# Altium PCB CPCIS_PWR_MOD_DC.pcbdoc
Units mm, origin at the board's own origin, x right, y up, seen from the top; angles counter-clockwise.
Board outline 159.9 x 99.9 mm, 2 copper layers (Top Layer, Bottom Layer), stack 1.57 mm thick; 60 components, 62 nets, 359 pads, 0 vias.
Unrouted connection lines stored in the file: 135.
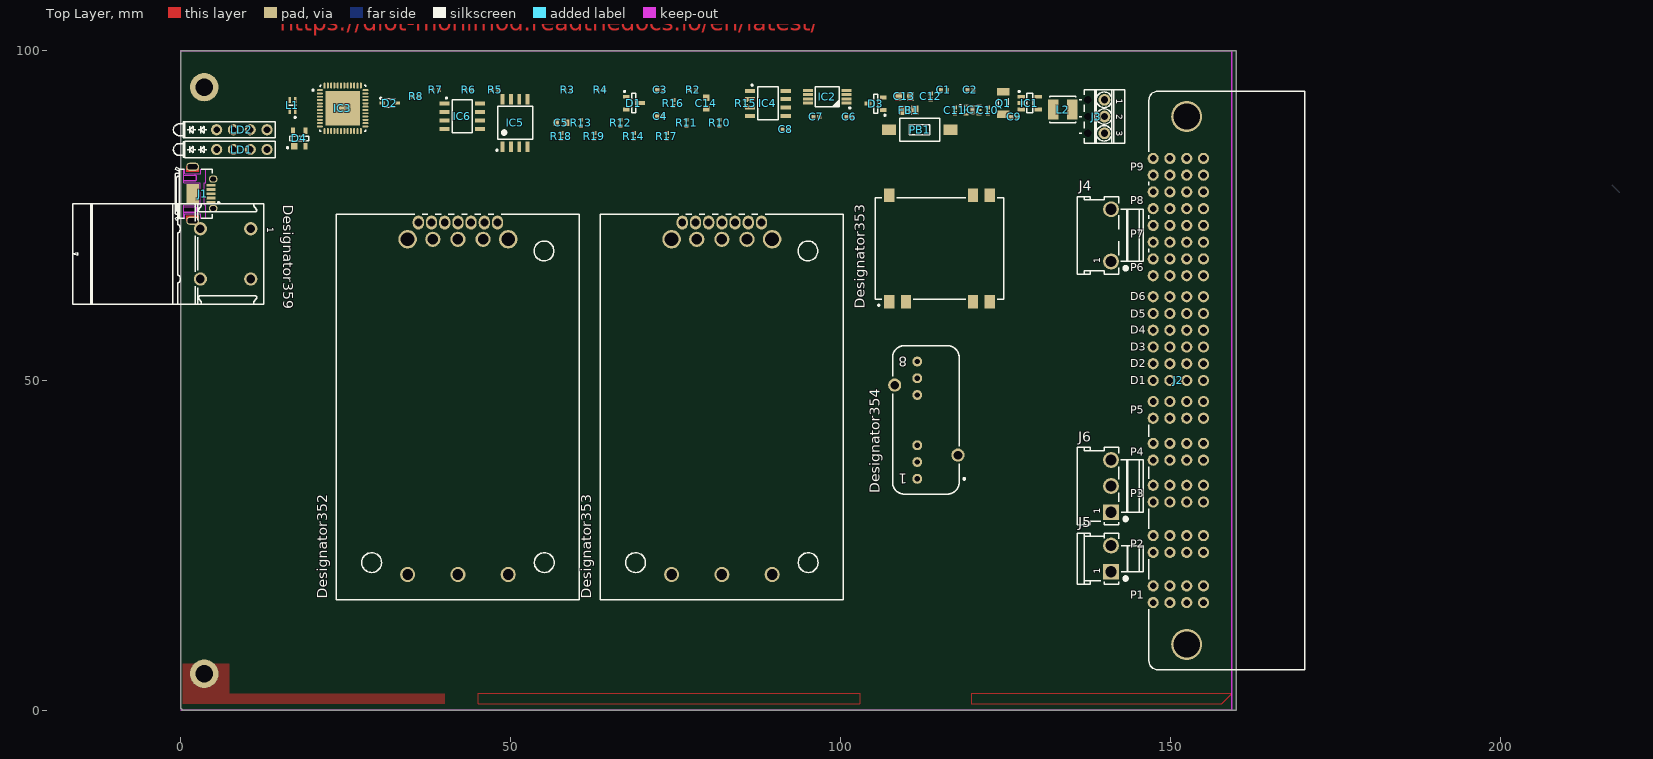
[diagram p0: Top Layer view]
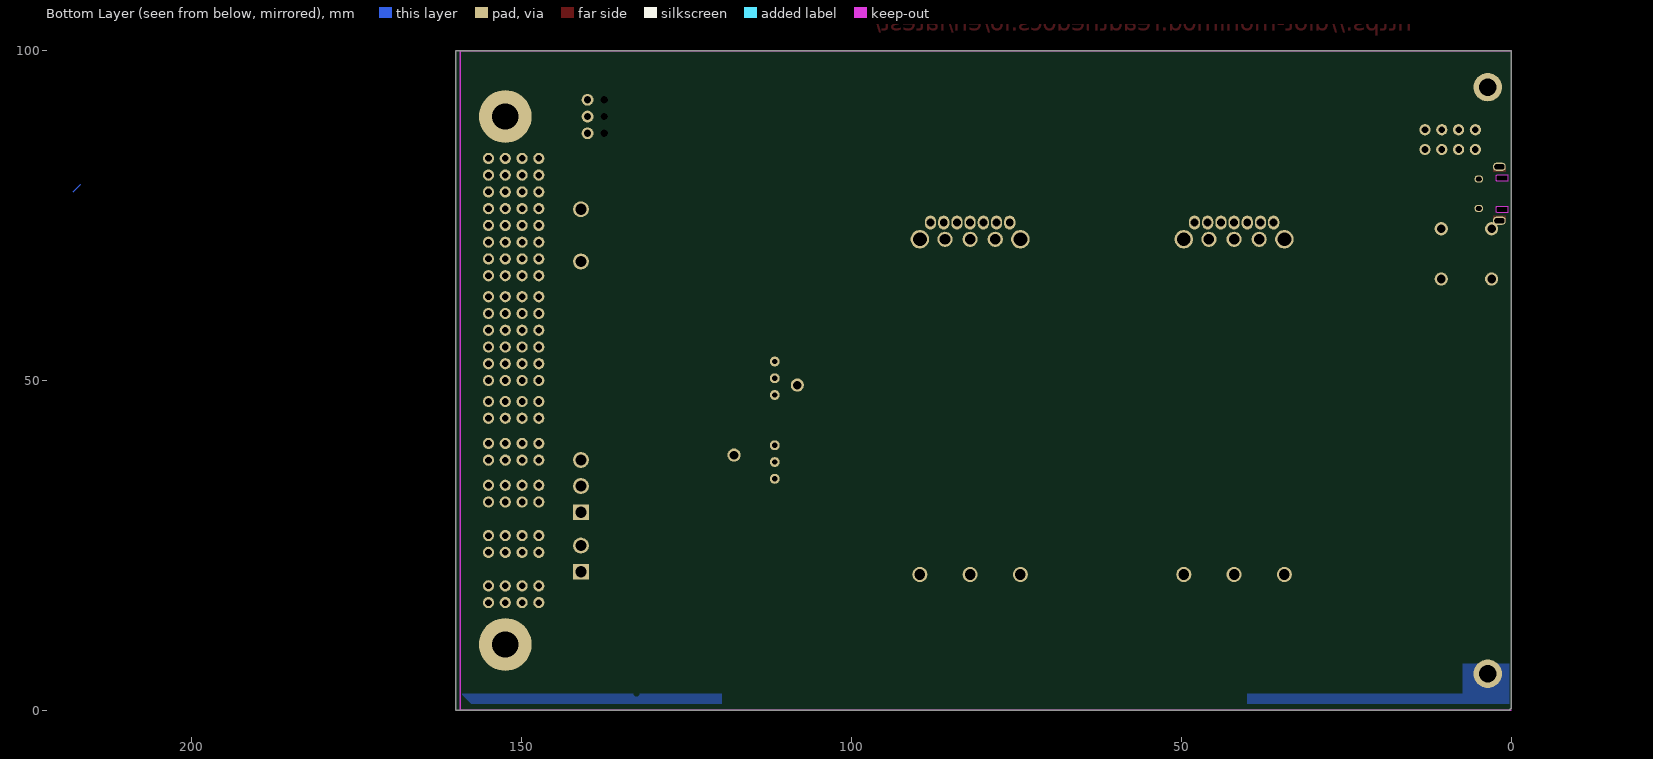
[diagram p1: Bottom Layer view, seen from below]

## Layer stack, top to bottom
Top Solder: solder mask 0.01, Solder Resist, Dk 3.5
Top Layer: signal copper 0.035
Dielectric 6: core 1.5, FR-4, Dk 4.6
Bottom Layer: signal copper 0.035
Bottom Solder: solder mask 0.01, Solder Resist, Dk 3.5

## Board outline
0.05,0.249 cw(c0,0) 0.18,0.18 cw(c0,0) 0.249,0.05 159.95,0.05 159.95,99.95 0.05,99.95

## Design rules (kind name [scope] priority, off if disabled: settings)
Clearance Clearance_NT [InComponent('NT*')] p1: gap=0 ignorepadtopadclearanceinfootprint=TRUE
Clearance Clearance_Poly [InPoly] p2: gap=0.18 ignorepadtopadclearanceinfootprint=FALSE
Clearance [All vs not HasFootprint('Net Tie')] p3: gap=0.09 ignorepadtopadclearanceinfootprint=FALSE except(0: Arc-Hole Track-Hole SMDPad-Hole THPad-Hole Via-Hole Fill-Hole Poly-Hole Region-Hole Text-Hole)
ComponentClearance ComponentClearance_pressfit [HasCompParameterValue('PressFit','Yes') vs InComponent('No Component')] p1: gap=5 collisioncheckmode=3 verticalgap=0.254 showdistances=FALSE
ComponentClearance ComponentClearance_NM [InComponentClass('NotMounted')] p2: gap=0 collisioncheckmode=3 verticalgap=0 showdistances=FALSE
ComponentClearance ComponentClearance_Top [not InComponentClass('Overlapping') and InComponentClass('Top Side Components') vs InComponentClass('Top Side Components')] p3: gap=0 collisioncheckmode=3 verticalgap=2540 showdistances=FALSE
ComponentClearance Overlapping [InComponentClass('Overlapping') vs InComponentClass('Overlapping')] p4: gap=0 collisioncheckmode=3 verticalgap=0 showdistances=FALSE
DiffPairsRouting [All] p1: maxlimit=0.2 minlimit=0.2 mostfreqgap=0.2 toplayer_minwidth=0.1 toplayer_maxwidth=0.1 toplayer_prefwidth=0.1 bottomlayer_minwidth=0.1 bottomlayer_maxwidth=0.1 bottomlayer_prefwidth=0.1 maxuncoupledlength=50
FabricationTestPointUsage TestPointUsage [All] p1: valid=0 allowmultiple=FALSE
FabricationTestpoint Testpoint [All] p1: side=3 testpointundercomponent=TRUE minsize=1.016 maxsize=2.54 preferedsize=1.524 minholesize=0 maxholesize=1.016 preferedholesize=0.813 testpointgrid=0.025 allowsidetop=TRUE allowsidebottom=TRUE usegrid=TRUE gridtolerance=0
Height [All] p1: minheight=0 maxheight=25 prefheight=10
HoleSize [All] p1: absolutevalues=TRUE maxlimit=5 minlimit=0.2 maxpercent=80.000 minpercent=20.000
HoleToHoleClearance [All] p1: gap=0.2 allowstackedmicrovias=TRUE
Length "Length CPCIs2a + XS" [InNetClass('CPCIs2a') or InxSignalClass('CPCIs2 XS')] p1: maxlimit=126 minlimit=121
Length "Length CPCIs5a + XS" [InNetClass('CPCIs5a')    or InxSignalClass('CPCIs5 XS')] p2: maxlimit=155.1 minlimit=151
MatchedLengths DiffPair_gbtclkm2c_MatchedLengths [InDifferentialPair ('FMCGBTCLKM2C_C1') Or InDifferentialPair ('FMCGBTCLKM2C_C0')] p1: tolerance=5 checknetsindiffpair=FALSE checkdiffpairvsdiffpair=TRUE checkxsignals=TRUE checkothers=TRUE
MatchedLengths DiffPair_gbtxClockDes_MatchedLengths [InDifferentialPair ('GBTXCLOCKDES_N0') Or InDifferentialPair ('GBTXCLOCKDES_P0') Or InDifferentialPair ('GBTXCLOCKDES_N1') Or InDifferentialPair ('GBTXCLOCKDES_P1')Or InDifferentialPair ('GBTXCLOCKDES_N2') Or InDifferentialPair ('GBTXCLOCKDES_P2')Or InDifferentialPair ('GBTXCLOCKDES_N3') Or InDifferentialPair ('GBTXCLOCKDES_P3') Or InDifferentialPair ('GBTXCLOCKDES_N4') Or InDifferentialPair ('GBTXCLOCKDES_P4')] p2: tolerance=5 checknetsindiffpair=FALSE checkdiffpairvsdiffpair=TRUE checkxsignals=TRUE checkothers=TRUE
MatchedLengths DiffPair_Scout_ScclkMatchedLengths [InDifferentialPair ('GBTXELINKSSCCLK') Or InDifferentialPair ('GBTXELINKSSCOUT')] p3: tolerance=5 checknetsindiffpair=FALSE checkdiffpairvsdiffpair=TRUE checkxsignals=TRUE checkothers=TRUE
MinimumAnnularRing MinimumAnnularRing_Via [IsVia] p1: minimumring=0.12
MinimumAnnularRing [All] p2: minimumring=0.198
MinimumSolderMaskSliver [IsThruPin vs IsThruPin] p1: minsoldermaskwidth=0
NetAntennae [All] p1 off: netantennaetolerance=0
PermittedLayers [All] p1: toplayerpermitted=TRUE bottomlayerpermitted=FALSE
PlaneClearance [All] p1: clearance=0.25
PlaneConnect PlaneConnect_ft_pcbm [InPadClass('ft_pcbm')] p1: planeconnectstyle=Relief reliefexpansion=0.25 reliefentries=4 reliefconductorwidth=0.2 reliefairgap=0.2
PlaneConnect PlaneConnect_Vias [IsVia or InPadClass('Direct')] p2: planeconnectstyle=Direct reliefexpansion=0.508 reliefentries=4 reliefconductorwidth=0.254 reliefairgap=0.254
PlaneConnect "PlaneConnect_0 > 0.5" [AsMM(HoleDiameter)<0.5] p3: planeconnectstyle=Relief reliefexpansion=0.3 reliefentries=4 reliefconductorwidth=0.2 reliefairgap=0.2
PlaneConnect "PlaneConnect_0.5 > 1" [(AsMM(HoleDiameter)>=0.5) and (AsMM(HoleDiameter)<1)] p4: planeconnectstyle=Relief reliefexpansion=0.3 reliefentries=4 reliefconductorwidth=0.25 reliefairgap=0.2
PlaneConnect "PlaneConnect_1 > 1.5" [(AsMM(HoleDiameter)>=1) and (AsMM(HoleDiameter)<1.5)] p5: planeconnectstyle=Relief reliefexpansion=0.3 reliefentries=4 reliefconductorwidth=0.3 reliefairgap=0.2
PlaneConnect "PlaneConnect_1.5 > 2" [(AsMM(HoleDiameter)>=1.5) and (AsMM(HoleDiameter)<2)] p6: planeconnectstyle=Relief reliefexpansion=0.3 reliefentries=4 reliefconductorwidth=0.4 reliefairgap=0.2
PlaneConnect [All] p7: planeconnectstyle=Relief reliefexpansion=0.3 reliefentries=4 reliefconductorwidth=0.5 reliefairgap=0.2
PolygonConnect PolygonConnect_Vias [IsVia or InPadClass('Direct') or InNetClass('ESD_STRIP')] p1: connectstyle=Direct reliefconductorwidth=0.254 reliefentries=4 polygonreliefangle="90 Angle" airgapwidth=0.254
PolygonConnect "PolygonConnect_0 > 0.5" [AsMM(HoleDiameter)<0.5] p2: connectstyle=Relief reliefconductorwidth=0.2 reliefentries=4 polygonreliefangle="90 Angle" airgapwidth=0.2
PolygonConnect "PolygonConnect_0.5 > 1" [(AsMM(HoleDiameter)>=0.5) and (AsMM(HoleDiameter)<1)] p3: connectstyle=Relief reliefconductorwidth=0.25 reliefentries=4 polygonreliefangle="90 Angle" airgapwidth=0.2
PolygonConnect "PolygonConnect_1 > 1.5" [(AsMM(HoleDiameter)>=1) and (AsMM(HoleDiameter)<1.5)] p4: connectstyle=Relief reliefconductorwidth=0.3 reliefentries=4 polygonreliefangle="90 Angle" airgapwidth=0.2
PolygonConnect "PolygonConnect_1.5 > 2" [(AsMM(HoleDiameter)>=1.5) and (AsMM(HoleDiameter)<2)] p5: connectstyle=Relief reliefconductorwidth=0.4 reliefentries=4 polygonreliefangle="90 Angle" airgapwidth=0.2
PolygonConnect [All] p6: connectstyle=Relief reliefconductorwidth=0.5 reliefentries=4 polygonreliefangle="90 Angle" airgapwidth=0.2
RoomDefinition CPCIS_PWR_MOD [InComponentClass('CPCIS_PWR_MOD')] p1: confinementstyle=ConfineIn formatcopy=TRUE lockcomponents=FALSE outline 58.332,10.737 73.343,10.737 73.343,70.732 58.332,70.732
RoutingVias [All] p1: holewidth=0.3 width=0.65 viastyle="Through Hole" minholewidth=0.2 minwidth=0.45 maxholewidth=0.5 maxwidth=1
ShortCircuit ShortCircuit_NT [InComponent('J34') or  InComponent('J31') or InComponent('J30') or InComponent('J29') or InComponent('J33') or InComponent('J26') vs InComponent('NT*')] p1: allowed=TRUE
ShortCircuit [All] p2: allowed=FALSE
SilkToSilkClearance [All] p1: silktosilkclearance=0.05
SilkToSolderMaskClearance [IsPad] p1: minsilkscreentomaskgap=0.08 clearancetoexposedcopper=TRUE
SolderMaskExpansion [All] p1: expansion=0
ViasUnderSMD ViasUnderSMD_1 [HasFootprint ('CAPC0603X33N')   or HasFootprint ('RESC1005X40N')  or HasFootprint('CAPC1608X87N')   or HasFootprint('CAPC1005X55N')   or  HasFootprint('Net Tie')] p1: allowed=TRUE
ViasUnderSMD [not InComponentClass('Overlapping')] p2: allowed=FALSE
Width [All] p1: maxlimit=2.54 minlimit=0.1 preferedwidth=0.1 minimp=50.000000 maximp=50.000000 favimp=50.000000
16 further rules are at their usual default settings.

## Classes and differential pairs
pad class Direct: Free-P13

## Components (designator, comment, footprint, x,y, rotation, side; value= is the part's Value field where it differs from the comment)
C1 "12pF" CAPC1005X55N 115.675,94.05 r0 top
C2 "12pF" CAPC1005X55N 119.675,94.05 r0 top
C3 "100nF" CAPC1005X55N 72.675,94.05 r0 top
C4 "100nF" CAPC1005X55N 72.675,90.05 r0 top
C5 "1uF" CAPC1608X87N 57.675,89.05 r0 top
C6 "100nF" CAPC1005X55N 101.325,89.95 r180 top
C7 "100nF" CAPC1005X55N 96.325,89.95 r180 top
C8 "100nF" CAPC1005X55N 91.675,88.05 r0 top
C9 "100nF" CAPC1005X55N 126.325,89.95 r180 top
C10 "100nF" CAPC1005X55N 122.325,90.95 r270 top
C11 "100nF" CAPC1005X55N 117.325,90.95 r270 top
C12 "1uF" CAPC1005X55N 113.675,93.05 r90 top
C13 "10uF" CAPC2012X135N 109.675,93.05 r0 top
C14 "68pF" CAPC1608X87N 79.675,92.05 r90 top
D1 "SM712" SOT95P237X112-3N 68.675,92.05 r0 top
D2 "1N4148WS" SODFL2512X100N 31.675,92.05 r0 top
D3 "SM712" SOT95P237X112-3N 105.325,91.95 r180 top
D4 "PRTR5V0U2X" SOT190P230X110-4N 17.95,86.675 r90 top
Designator352 "Comment" DCDC_DELTA_Q48SC12033NRDH 42,46 r90 top
Designator353 "Comment" DCDC_TRACO_TMR2WISM 115,70 r90 top
Designator353 "Comment" DCDC_DELTA_Q48SC12033NRDH 82,46 r90 top
Designator354 "Comment" DCDC_TRACO_TMR9WI 113,44 r90 top
Designator359 "Comment" PHOENIX_1804797 6.81,69.19 r270 top
FB1 "220R@100MHz" INDC2012X105N 110.325,90.95 r180 top
IC1 "24AA02E48T-I/OT" SOT95P280X145-5N 128.675,92.05 r0 top
IC2 "M24256-BRDW6" SOP65P640X120-8N 98,93 r180 top
IC3 "ATSAMD21G18A-MF" QFN50P700X700X100-49N-S525 24.55,91.25 r0 top
IC4 "ST485ECDR" SOIC127P600X175-8N 89,92 r0 top
IC5 "AT25SF161-SSHD-B" SOIC127P790X216-8N 50.675,89.05 r90 top
IC6 "ST485ECDR" SOIC127P600X175-8N 42.675,90.05 r0 top
IC7 "AUR9705AGD" SON65P200X200X80-7N-R65X145 120,91 r0 top
J1 "Micro-USB AB 2.0" HIROSE_ZX62RD-AB-5P8(30) 4.61,78.3 r270 top
J2 "PwrBlade" AMPHENOL_51939-667 155,83.66 r0 top
J3 "=Family" PHOENIX_1725669 140,90 r270 top
J4 "KK®" MOLEX_26-62-4030 141,72 r90 top
J5 "KK®" MOLEX_26-60-4020 141,23 r90 top
J6 "KK®" MOLEX_26-60-4030 141,34 r90 top
L1 "90R@100MHz" IND_MURATA_DLW21S 16.95,91.675 r90 top
L2 "2.2uH" IND_MURATA_LQH44PN_P0 133.675,91.05 r0 top
LD1 "Red/Green" LED_DIALIGHT_571-0112F 5.46,85 r0 top
LD2 "Red/Green" LED_DIALIGHT_571-0112F 5.46,88 r0 top
PB1 "Push Button" PB_TYCO_FSMSM 112,88 r180 top
Q1 "32.768KHZ" XTAL_ABRACON_ABS09 124.675,92.05 r90 top
R2 "1k" RESC1005X40N 77.675,94.05 r0 top
R3 "10k" RESC1005X40N 58.675,94.05 r0 top
R4 "10k" RESC1005X40N 63.675,94.05 r0 top
R5 "1k" RESC1005X40N 47.675,94.05 r0 top
R6 "10k" RESC1005X40N 43.675,94.05 r0 top
R7 "1k" RESC1005X40N 38.675,94.05 r0 top
R8 "10k" RESC1005X40N 35.675,93.05 r0 top
R10 "10k" RESC1005X40N 81.675,89.05 r90 top
R11 "1k" RESC1005X40N 76.675,89.05 r90 top
R12 "49R9" RESC1005X40N 66.675,89.05 r90 top
R13 "10k" RESC1005X40N 60.675,89.05 r90 top
R14 "1k" RESC1005X40N 68.675,87.05 r90 top
R15 "100k" RESC1005X40N 85.675,92.05 r90 top
R16 "22k" RESC1005X40N 74.675,92.05 r90 top
R17 "1k" RESC1005X40N 73.675,87.05 r90 top
R18 "1k" RESC1005X40N 57.675,87.05 r90 top
R19 "1k" RESC1005X40N 62.675,87.05 r90 top

## Footprints (in the part's own frame and the unit in brackets; to place one, negate y for a bottom-side part, rotate by r counter-clockwise, add the part's x,y. Pads: shape width x height; smd on the part's side, far side on the other; paste and mask are expansions set on the pad)
AMPHENOL_51939-667 [mm] "Right Angle PowerBlade Power Connector 3ACP + 2P + 24S + 4P Contacts"
  round 1.7 hole 1: A1(0,-33.66) A2(0,-31.12) A3(0,-28.58) A4(0,-26.04) A5(0,-23.5) A6(0,-20.96) B1(-2.54,-33.66) B2(-2.54,-31.12) B3(-2.54,-28.58) B4(-2.54,-26.04) B5(-2.54,-23.5) B6(-2.54,-20.96) C1(-5.08,-33.66) C2(-5.08,-31.12) C3(-5.08,-28.58) C4(-5.08,-26.04) C5(-5.08,-23.5) C6(-5.08,-20.96) D1(-7.62,-33.66) D2(-7.62,-31.12) D3(-7.62,-28.58) D4(-7.62,-26.04) D5(-7.62,-23.5) D6(-7.62,-20.96) P1(-7.62,-67.32) P1(-7.62,-64.78) P1(-5.08,-67.32) P1(-5.08,-64.78) P1(-2.54,-67.32) P1(-2.54,-64.78) P1(0,-67.32) P1(0,-64.78) P2(-7.62,-59.7) P2(-7.62,-57.16) P2(-5.08,-59.7) P2(-5.08,-57.16) P2(-2.54,-59.7) P2(-2.54,-57.16) P2(0,-59.7) P2(0,-57.16) P3(-7.62,-52.08) P3(-7.62,-49.54) P3(-5.08,-52.08) P3(-5.08,-49.54) P3(-2.54,-52.08) P3(-2.54,-49.54) P3(0,-52.08) P3(0,-49.54) P4(-7.62,-45.73) P4(-7.62,-43.19) P4(-5.08,-45.73) P4(-5.08,-43.19) P4(-2.54,-45.73) P4(-2.54,-43.19) P4(0,-45.73) P4(0,-43.19) P5(-7.62,-39.38) P5(-7.62,-36.84) P5(-5.08,-39.38) P5(-5.08,-36.84) P5(-2.54,-39.38) P5(-2.54,-36.84) P5(0,-39.38) P5(0,-36.84) P6(-7.62,-17.78) P6(-7.62,-15.24) P6(-5.08,-17.78) P6(-5.08,-15.24) P6(-2.54,-17.78) P6(-2.54,-15.24) P6(0,-17.78) P6(0,-15.24) P7(-7.62,-12.7) P7(-7.62,-10.16) P7(-5.08,-12.7) P7(-5.08,-10.16) P7(-2.54,-12.7) P7(-2.54,-10.16) P7(0,-12.7) P7(0,-10.16) P8(-7.62,-7.62) P8(-7.62,-5.08) P8(-5.08,-7.62) P8(-5.08,-5.08) P8(-2.54,-7.62) P8(-2.54,-5.08) P8(0,-7.62) P8(0,-5.08) P9(-7.62,-2.54) P9(-7.62,0) P9(-5.08,-2.54) P9(-5.08,0) P9(-2.54,-2.54) P9(-2.54,0) P9(0,-2.54) P9(0,0)
  round 4.7 / inner round 4.7 / far side round 8 hole 4: MTG1(-2.54,6.345) MTG2(-2.54,-73.665)
  silkscreen extent -8.25,-77.47 15.37,10.16, body extent -8.25,-77.47 15.37,10.16, height 12.57
CAPC1005X55N [mm] "Capacitor, Non-Polarized, Chip; 1.00mm L X 0.50mm W X 0.70mm H, IPC Medium Density"
  rect 0.62x0.62 smd: 1(-0.45,0) 2(0.45,0)
  body extent -0.52,-0.27 0.53,0.28, height 0.55
CAPC1608X87N [mm] "Chip Capacitor, Body 1.6x0.8mm IPC Medium Density"
  rect 0.95x1 smd: 1(-0.8,0) 2(0.8,0)
  body extent -0.87,-0.47 0.88,0.48, height 0.87
CAPC2012X135N [mm] "Chip Capacitor, Body 2.0x1.25mm, IPC Medium Density"
  rect 1.05x1.4 smd: 1(-0.9,0) 2(0.9,0)
  silkscreen extent 0,-0.58 0,0.58, body extent -1.05,-0.67 1.05,0.68, height 1.25
DCDC_DELTA_Q48SC12033NRDH [mm] "400W DC/DC DC-DC Converter with Heat-Spreader, Body 58.4mm x 36.8mm x 12.7mm"
  round 2.3 hole 1.6: 1(-25.4,7.6) 2(-25.4,-0.02) 4(-25.4,-7.64) 6(25.4,-3.83) 7(25.4,-0.02) 8(25.4,3.79)
  round 2.8 hole 2.1: 5(25.4,-7.64) 9(25.4,7.6)
  oval 2.1x1.7 hole 1.2: 10(27.94,-6.02) 11(27.94,-4.02) 12(27.94,-2.02) 13(27.94,-0.02) 14(27.94,1.98) 15(27.94,3.98) 16(27.94,5.98)
  silkscreen extent -29.2,-18.4 29.2,18.4, body extent -29.2,-18.41 29.2,18.42, height 12.7
DCDC_TRACO_TMR2WISM [mm] "TMR 2WISM Series, DC/DC Converter,  Body 19x14.9mm"
  rect 2.05x1.55 smd: 1(-8.1,7.62) 2(-8.1,5.08) 6(-8.1,-5.08) 7(-8.1,-7.62) 8(8.1,-7.62) 9(8.1,-5.08) 14(8.1,7.62)
  silkscreen extent -8.72,-9.75 7.7,9.75, body extent -8.5,-9.75 8.5,9.75, height 9.2
DCDC_TRACO_TMR9WI [mm] "TMR 9 WI Series, Body 21.8x9.6mm, Compact SIP-8 Package"
  round 1.5 hole 0.8: 1(-8.9,1.375) 2(-6.36,1.375) 3(-3.82,1.375) 6(3.8,1.375) 7(6.34,1.375) 8(8.88,1.375)
  round 2 hole 1.3: 9(-5.3,-4.8) 12(5.3,4.8)
  silkscreen extent -11.22,-5.9 11.28,5.12, body extent -11.22,-5.02 11.28,5.16, height 11.7
HIROSE_ZX62RD-AB-5P8(30) [mm] "Right Angle, SMD Micro-USB Type AB - Reverse (Top mount), Shell Through Hole"
  rect 0.4x1.35 smd: 1(1.3,0) 2(0.65,0) 3(0,0) 4(-0.65,0) 5(-1.3,0)
  rrect80% 1.225x1.9 hole 0.8 slot 1.5 at 90 deg: 6(-4.088,-2.8) 6(4.088,-2.8)
  rrect80% 1.05x1.25 hole 0.65 slot 0.85 at 90 deg: 6(-2.225,0.325) 6(2.225,0.325)
  rect 2.9x1.9 smd: PastePad(0,-2.8)
  Top Layer region: -4.2,-1.85 -4.2,-3.75 -3.3,-3.75 -3.3,-3.75 -3.3,-1.85
  Top Layer region: 4.2,-3.75 4.2,-1.85 3.3,-1.85 3.3,-1.85 3.3,-3.75
  Top Layer keep-out lines w0.1: 3.75,-4.125 3.75,-4 3.05,-4 3.05,-1.6 3.75,-1.6 3.75,-0.825 1.7,-0.825 1.7,-1.025 -1.7,-1.025 -1.7,-0.825 -3.75,-0.825 -3.75,-1.6 -3.05,-1.6 -3.05,-4 -3.75,-4 -3.75,-4.125 -2.8,-4.125 -2.8,-2.45 cw(c-2.6,-2.45) -2.6,-2.25 -2.15,-2.25 cw(c-2.15,-2.45) -1.95,-2.45 -1.95,-4.125 -1.65,-4.125 -1.65,-1.65 1.65,-1.65 1.65,-4.125 1.95,-4.125 1.95,-2.45 cw(c2.15,-2.45) 2.15,-2.25 2.6,-2.25 cw(c2.6,-2.45) 2.8,-2.45 2.8,-4.125 3.75,-4.125
  Keep-Out Layer board cut-out: 1.95,-4.125 1.95,-2.45 1.965,-2.373 2.009,-2.309 2.074,-2.265 2.15,-2.25 2.15,-2.25 2.6,-2.25 2.677,-2.265 2.741,-2.309 2.785,-2.373 2.8,-2.45 2.8,-2.45 2.8,-4.125
  Keep-Out Layer board cut-out: -2.8,-4.125 -2.8,-2.45 -2.785,-2.373 -2.741,-2.309 -2.676,-2.265 -2.6,-2.25 -2.6,-2.25 -2.15,-2.25 -2.073,-2.265 -2.009,-2.309 -1.965,-2.373 -1.95,-2.45 -1.95,-2.45 -1.95,-4.125
  silkscreen extent -4,-5.42 4,1.28, body extent -4.32,-5.42 4.33,0.47, height 2.78
IND_MURATA_DLW21S [mm] "Common Mode Choke Coil, DLW21S Series - Body 2 x 1.2mm"
  rect 0.9x0.4 smd: 1(-0.85,-0.4) 2(0.85,-0.4) 3(0.85,0.4) 4(-0.85,0.4)
  silkscreen extent -1.92,-0.6 0,0.6, body extent -1,-0.6 1,0.6, height 1.4
IND_MURATA_LQH44PN_P0 [mm] "Wire Wound Ferrite Inductor for Power Lines, 4mm L X 4mm W X 1.65mm H, MURATA LQH44PN_P0 Series"
  rect 1.55x3 smd: 1(-1.425,0) 2(1.425,0)
  silkscreen extent -2,-2 2,2, body extent -2,-2 2,2, height 1.65
INDC2012X105N [mm] "Chip Inductor, EIA 0805, Metric 2012, Body 2.0x1.25mm, IPC Medium Density"
  rect 1.15x1.45 smd: 1(-0.9,0) 2(0.9,0)
  silkscreen extent 0,-0.6 0,0.6, body extent -1.1,-0.7 1.1,0.7, height 1.1
LED_DIALIGHT_571-0112F [mm] "2x 2mm LED (Top: Red, Bot: Green) PCB Edge Mounting (Without positioning pins) DIALIGHT 571 Serie"
  round 1.7 hole 1: 1(0,0) 2(2.54,0) 3(5.08,0) 4(7.62,0)
  silkscreen extent -6.55,-1.24 8.89,1.24, body extent -6.55,-1.24 8.89,1.24, height 8.61
MOLEX_26-60-4020 [mm] "3.96mm (.156\") Pitch KK® Solid Header, Vertical, Friction Lock, 2 Circuits, Tin (Sn) Plating"
  rect 2.4x2.4 hole 1.7: 1(-1.981,0)
  round 2.4 hole 1.7: 2(1.981,0)
  silkscreen extent -3.89,-4.9 3.89,5.11, body extent -3.89,-4.9 3.89,5.11, height 14.73
MOLEX_26-60-4030 [mm] "3.96mm (.156\") Pitch KK® Solid Header, Vertical, Friction Lock, 3 Circuits, Tin (Sn) Plating"
  rect 2.4x2.4 hole 1.7: 1(-3.96,0)
  round 2.4 hole 1.7: 2(0,0) 3(3.96,0)
  silkscreen extent -5.87,-4.9 5.87,5.11, body extent -5.86,-4.9 5.87,5.11, height 14.73
MOLEX_26-62-4030 [mm] "3.96mm (.156\") Pitch KK® Solid Header, Vertical, Friction Lock, 3 Circuits Without Contact Number 2, Tin (Sn) Plating"
  round 2.4 hole 1.7: 1(-3.96,0) 3(3.96,0)
  silkscreen extent -5.86,-4.9 5.86,5.1, body extent -5.87,-4.9 5.87,5.11, height 14.22
PB_TYCO_FSMSM [mm] "Body 3.5x6.0mm, Pushbutton Switch,  TYCO FSMSM Serie"
  rect 2.1x1.6 smd: 1(-4.65,0) 2(4.65,0)
  silkscreen extent -3,-1.75 3,1.75, body extent -5,-1.75 5,1.75, height 4.3
PHOENIX_1725669 [mm] "Micro PCB Terminal Block, Pitch 2.54mm, 3 Positions, Screw Connection"
  round 1.8 hole 1.1: 1(-2.54,0) 2(0,0) 3(2.54,0)
  round 0.5 hole 1.1 unplated mask+0.3: 4(-2.54,-2.54) 5(0,-2.54) 6(2.54,-2.54)
  silkscreen extent -4.04,-3.81 4.04,3.1, body extent -4.04,-3.1 4.04,3.1, height 8.5
PHOENIX_1804797 [mm] "PCB Header, 20A, 630V, Pitch: 7.62mm, 2 Positions Header, PC Serie"
  round 2 hole 1.3: 1(-3.81,3.81) 1(-3.81,-3.81) 2(3.81,3.81) 2(3.81,-3.81)
  silkscreen extent -7.61,-23.19 7.62,5.81, body extent -7.61,-23.19 7.61,5.81, height 14.25
QFN50P700X700X100-49N-S525 [mm] "QFN, 0.50mm Pitch, Square; 48 Pin, 7.00mm L X 7.00mm W X 1mm H body (W/Thermal Tab 5.25mm X 5.25mm), IPC Medium Density"
  oval 0.9x0.3 smd: 1(-3.45,2.75) 2(-3.45,2.25) 3(-3.45,1.75) 4(-3.45,1.25) 5(-3.45,0.75) 6(-3.45,0.25) 7(-3.45,-0.25) 8(-3.45,-0.75) 9(-3.45,-1.25) 10(-3.45,-1.75) 11(-3.45,-2.25) 12(-3.45,-2.75) 25(3.45,-2.75) 26(3.45,-2.25) 27(3.45,-1.75) 28(3.45,-1.25) 29(3.45,-0.75) 30(3.45,-0.25) 31(3.45,0.25) 32(3.45,0.75) 33(3.45,1.25) 34(3.45,1.75) 35(3.45,2.25) 36(3.45,2.75)
  oval 0.3x0.9 smd: 13(-2.75,-3.45) 14(-2.25,-3.45) 15(-1.75,-3.45) 16(-1.25,-3.45) 17(-0.75,-3.45) 18(-0.25,-3.45) 19(0.25,-3.45) 20(0.75,-3.45) 21(1.25,-3.45) 22(1.75,-3.45) 23(2.25,-3.45) 24(2.75,-3.45) 37(2.75,3.45) 38(2.25,3.45) 39(1.75,3.45) 40(1.25,3.45) 41(0.75,3.45) 42(0.25,3.45) 43(-0.25,3.45) 44(-0.75,3.45) 45(-1.25,3.45) 46(-1.75,3.45) 47(-2.25,3.45) 48(-2.75,3.45)
  rect 5.25x5.25 smd: 49(0,0)
  silkscreen extent -4.62,-3.5 3.5,3.5, body extent -3.5,-3.5 3.5,3.5, height 1
RESC1005X40N [mm] "Chip Resistor, EIA 0402, Metric 1005, Body 1.0x0.5mm, IPC Medium Density"
  rect 0.58x0.62 smd: 1(-0.47,0) 2(0.47,0)
  body extent -0.52,-0.27 0.53,0.28, height 0.4
SODFL2512X100N [mm] "SODFL Diode; 1.70mm W X 1.25mm L X 1.00mm H body, IPC Medium Density"
  rect 0.84x0.46 smd: 1(-1.14,0) 2(1.14,0)
  silkscreen extent -1.47,-0.65 0.85,0.85, body extent -1.35,-0.65 1.35,0.65, height 1
SOIC127P600X175-8N [mm] "SOIC 8, Pitch 1.27mm - Body 4x5mm, IPC Medium Density"
  rect 1.55x0.6 smd: 1(-2.7,1.905) 2(-2.7,0.635) 3(-2.7,-0.635) 4(-2.7,-1.905) 5(2.7,-1.905) 6(2.7,-0.635) 7(2.7,0.635) 8(2.7,1.905)
  silkscreen extent -2.52,-2.5 1.55,2.88, body extent -3.1,-2.5 3.1,2.5, height 1.75
SOIC127P790X216-8N [mm] "SOIC, 1.27mm, Pitch; 8 Pin, 5.285mm W X 5.335mm L X 2.16mm H body, IPC Medium Density"
  rect 1.6x0.6 smd: 1(-3.6,1.905) 2(-3.6,0.635) 3(-3.6,-0.635) 4(-3.6,-1.905) 5(3.6,-1.905) 6(3.6,-0.635) 7(3.6,0.635) 8(3.6,1.905)
  silkscreen extent -4.27,-2.65 2.47,2.87, body extent -3.86,-2.54 3.86,2.54, height 2
SON65P200X200X80-7N-R65X145 [mm] "SON, 0.65mm Pitch, 6 Pin, 2.00mm W X 2.00mm L X 0.80mm H body (W/Thermal Tab 0.65mm X 1.45mm), IPC Medium Density"
  rect 0.75x0.35 smd: 1(-1,0.65) 2(-1,0) 3(-1,-0.65) 4(1,-0.65) 5(1,0) 6(1,0.65)
  rect 0.65x1.45 smd: 7(0,0)
  silkscreen extent -1.97,0.53 -1.72,0.77, body extent -1.05,-1.05 1.05,1.05, height 0.77
SOP65P640X120-8N [mm] "SOP, 0.65mm pitch; 8 pin, 4.40mm W X 3.00mm L X 1.20mm H body, IPC Medium Density"
  rect 1.5x0.45 smd: 1(-2.9,0.975) 2(-2.9,0.325) 3(-2.9,-0.325) 4(-2.9,-0.975) 5(2.9,-0.975) 6(2.9,-0.325) 7(2.9,0.325) 8(2.9,0.975)
  silkscreen extent -3.53,-1.5 1.83,1.82, body extent -3.2,-1.55 3.2,1.55, height 1.2
SOT95P237X112-3N [mm] "SOT, 0.95mm, pitch; 3 pin,1.30mm W X 2.92mm L X 1.12mm H body, IPC Medium Density"
  rect 1.05x0.6 smd: 1(-1.15,0.95) 2(-1.15,-0.95) 3(1.15,0)
  silkscreen extent -1.52,-1.45 0.3,1.87, body extent -1.25,-1.5 1.25,1.5, height 1.1
SOT95P280X145-5N [mm] "SOT, 0.95mm pitch; 5 pin, 1.60mm W X 2.90mm L X 1.45mm H body, IPC Medium Density"
  rect 1.1x0.6 smd: 1(-1.3,0.95) 2(-1.3,0) 3(-1.3,-0.95) 4(1.3,-0.95) 5(1.3,0.95)
  silkscreen extent -1.72,-1.45 0.43,1.87, body extent -1.4,-1.5 1.4,1.5, height 1.45
SOT190P230X110-4N [mm] "SOT143, SOT, 1.90mm Pitch; 4 Pin, 1.30mm W X 2.90mm L X 1.10mm H body, IPC Medium Density"
  rect 1x1 smd: 1(-1.15,0.75)
  rect 1x0.6 smd: 2(-1.15,-0.95) 3(1.15,-0.95) 4(1.15,0.95)
  silkscreen extent -1.52,-1.45 0.33,1.87, body extent -1.25,-1.5 1.25,1.5, height 1.1
XTAL_ABRACON_ABS09 [mm] "2 Pins, 4.1x1.5mm, SMD Low Profile Crystal, ABS09 Series"
  rect 1.1x1.9 smd: 1(-1.7,0) 2(1.7,0)
  silkscreen extent -0.75,-0.75 0.75,0.75, body extent -2.05,-0.75 2.05,0.75, height 0.9

## Part data
C1 C2: library part CC0402_12PF_50V_5%_C0G, "Non-polarised capacitor", Case=0402, Manufacturer=GENERIC, Manufacturer1 ComponentHeight=0.55mm, Manufacturer1 Example=KEMET, Manufacturer1 Part Number=C0402C120J5GACTU, Tolerance=±5%, Voltage=50V, Author="CERN DEM JLC", Component Type=Standard, CreateDate=04.10.2016, HelpURL="\\cern.ch\dfs\Applications\Altium\Datasheets\CC0805_C0G_KEMET_(Commercial Grade).pdf", LatestRevisionDate=04.10.2016, Manufacturer Part Number=CC0402_12PF_50V_5%_C0G, Mounted=Yes, Part Description="SMD Multilayer Chip Ceramic Capacitor", Part Number=CC0402_12PF_50V_5%_C0G, Pin Count=2, Sense=No, SMD=Yes, Socket=No, Status=Preferred, TC=C0G/NP0
C3 C4 C6 C7 C8 C9 C10 C11: library part CC0402_100NF_16V_10%_X7R, "Non-polarised capacitor", Case=0402, Manufacturer=GENERIC, Manufacturer1 ComponentHeight=0.55mm, Manufacturer1 Example=MURATA, Manufacturer1 Part Number=GRM155R71C104KA88D, Tolerance=±10%, Voltage=16V, Author="CERN DEM JLC", Component Type=Standard, CreateDate=05.12.2013, HelpURL=\\cern.ch\dfs\Applications\Altium\Datasheets\CC0402_X7R_MURATA_GRM.pdf, LatestRevisionDate=03.12.2007, Manufacturer Part Number=CC0402_100NF_16V_10%_X7R, Mounted=Yes, Part Description="SMD Multilayer Chip Ceramic Capacitor", Part Number=CC0402_100NF_16V_10%_X7R, Pin Count=2, Sense=No, SMD=Yes, Socket=No, Status="Not Recommended", TC=X7R
C5: library part CC0603_1UF_16V_10%_X7R, "Non-polarised capacitor", Case=0603, Manufacturer=GENERIC, Manufacturer1 ComponentHeight=0.9mm, Manufacturer1 Example="YAGEO PHYCOMP", Manufacturer1 Part Number=223878615663, Manufacturer Part Number=CC0603_1uF_16V_10%_X7R, Tolerance=±10%, Voltage=16V, Author="CERN DEM JLC", Component Type=Standard, CreateDate=03.12.2007, HelpURL=\\cern.ch\dfs\Applications\Altium\Datasheets\CC0603_X7R_PHYCOMP.pdf, LatestRevisionDate=17.04.2015, Mounted=Yes, Part Description="SMD Multilayer Chip Ceramic Capacitor", Part Number=CC0603_1UF_16V_10%_X7R, Pin Count=2, Sense=No, SMD=Yes, Socket=No, Status=None, TC=X7R
C12: library part CC0402_1UF_16V_10%_X5R, "Non-polarised capacitor", Case=0402, Manufacturer=GENERIC, Manufacturer1 ComponentHeight=0.55mm, Manufacturer1 Example=TDK, Manufacturer1 Part Number=C1005X5R1C105KT, Tolerance=±10%, Voltage=16V, Author="CERN DEM JLC", Component Type=Standard, CreateDate=25.10.2012, HelpURL=\\cern.ch\dfs\Applications\Altium\Datasheets\CC0402_X5R_TDK_C.pdf, LatestRevisionDate=25.10.2012, Manufacturer Part Number=CC0402_1UF_16V_10%_X5R, Mounted=Yes, Part Description="SMD Multilayer Chip Ceramic Capacitor", Part Number=CC0402_1UF_16V_10%_X5R, Pin Count=2, Sense=No, SMD=Yes, Socket=No, Status=Preferred, TC=X5R
C13: library part CC0805_10UF_16V_10%_X5R, "Non-polarised capacitor", Case=0805, Manufacturer=GENERIC, Manufacturer1 ComponentHeight=1.4mm, Manufacturer1 Example=KEMET, Manufacturer1 Part Number=C0805C106K4PAC, Tolerance=±10%, Voltage=16V, Author="CERN DEM JLC", Component Type=Standard, CreateDate=03.12.2007, HelpURL=\\cern.ch\dfs\Applications\Altium\Datasheets\CC1206_X5R_KEMET.pdf, LatestRevisionDate=03.12.2007, Manufacturer Part Number=CC0805_10UF_16V_10%_X5R, Mounted=Yes, Part Description="SMD Multilayer Chip Ceramic Capacitor", Part Number=CC0805_10UF_16V_10%_X5R, Pin Count=2, Sense=No, SMD=Yes, Socket=No, Status=Preferred, TC=X5R
C14: library part CC0603_68PF_50V_5%_NP0, "Non-polarised capacitor", Case=0603, Manufacturer=GENERIC, Manufacturer1 ComponentHeight=0.87mm, Manufacturer1 Example=PHYCOMP, Manufacturer1 Part Number=223886715689, Tolerance=±5%, Voltage=50V, Author="CERN DEM JLC", Component Type=Standard, CreateDate=03.12.2007, HelpURL=\\cern.ch\dfs\Applications\Altium\Datasheets\CC0603_NP0_PHYCOMP.pdf, LatestRevisionDate=03.12.2007, Manufacturer Part Number=CC0603_68PF_50V_5%_NP0, Mounted=Yes, Part Description="SMD Multilayer Chip Ceramic Capacitor", Part Number=CC0603_68PF_50V_5%_NP0, Pin Count=2, Sense=No, SMD=Yes, Socket=No, Status=Preferred, TC=C0G/NP0
D1 D3: "Asymmetrical TVS Diode for Extended Common-Mode RS-485", Case=SOT-23, Manufacturer=SEMTECH, Power=400W, Voltage=12V/-7V, Author="CERN DEM JLC", Bonding=No, ComponentHeight=1.12mm, Component Type=Standard, CreateDate=23.04.2012, Device=SM712, HelpURL=\\cern.ch\dfs\Applications\Altium\Datasheets\SM712.pdf, LatestRevisionDate=23.04.2012, Manufacturer Part Number=SM712, Mounted=Yes, PackageDescription="SOT, 0.95mm, pitch; 3 pin,1.30mm W X 2.92mm L X 1.12mm H body, IPC Medium Density", Part Description="Asymmetrical TVS Diode for Extended Common-Mode RS-485", Part Number=SM712, Pin Count=3, PressFit=No, Sense=No, SMD=Yes, Socket=No, Status=Obsolete
D2: "Diode", Case=SOD-323F, Manufacturer="FAIRCHILD SEMICONDUCTOR", Power=150mA, Voltage=75V, Author="CERN DEM JLC", Bonding=No, ComponentHeight=1mm, Component Type=Standard, CreateDate=12.05.2011, Device=1N4148WS, HelpURL=\\cern.ch\dfs\Applications\Altium\Datasheets\1N4148WS.pdf, LatestRevisionDate=12.05.2011, Manufacturer Part Number=1N4148WS, Mounted=Yes, PackageDescription="SODFL Diode; 1.70mm W X 1.25mm L X 1.00mm H body, IPC Medium Density", Part Description="Small Signal Diodes", Part Number=1N4148WS, Pin Count=2, PressFit=No, Sense=No, SMD=Yes, Socket=No
D4: "Ultra Low Capacitance Double Rail-to-Rail ESD Protection Diode", Case=SOT143B, Manufacturer="NXP SEMICONDUCTORS", Voltage=5.5V, Author="CERN DEM JLC", Bonding=No, ComponentHeight=1.1mm, Component Type=Standard, CreateDate=2011-03-22, Device=PRTR5V0U2X, HelpURL=\\cern.ch\dfs\Applications\Altium\Datasheets\PRTR5V0U2X.pdf, LatestRevisionDate=2011-03-22, Manufacturer Part Number=PRTR5V0U2X, Mounted=Yes, PackageDescription="SOT143B, SOT, 1.90mm Pitch; 4 Pin, 1.30mm W X 2.90mm L X 1.10mm H body, IPC Medium Density", Part Description="Ultra Low Capacitance (1pF) Double Rail-to-Rail ESD Protection Diode (8kV)", Part Number=PRTR5V0U2X, Pin Count=4, PressFit=No, SMD=Yes, Socket=No, Table=Diodes
FB1: library part IND0805_MURATA_BLM21PG221SN1D, "Inductor", Case=0805, Manufacturer=MURATA, Manufacturer Part Number=BLM21PG221SN1D, Power=2A, Resistance=0.05R, Tolerance=±25%, Author="CERN DEM JLC", ComponentHeight=1.05mm, Component Type=Standard, CreateDate=2010-01-25, HelpURL=\\cern.ch\dfs\Applications\Altium\Datasheets\IND0402_MURATA_BLM21P.pdf, LatestRevisionDate=2010-01-25, Mounted=Yes, Part Description="SMD EMIFIL Suppression Chip Ferrite Bead", Part Number=IND0805_MURATA_BLM21PG221SN1D, Pin Count=2, SMD=Yes, Socket=No, Status=None, Table="Inductors SMD"
IC1: "1.7V-5.5V, 2K I2C Serial EEPROM With EUI-48 Node Identity", Case=SOT23-5, Manufacturer="MICROCHIP TECHNOLOGY", Author="CERN DEM MR", Bonding=No, ComponentHeight=1.45mm, Component Type=Standard, CreateDate=31.03.2016, Device=24AA02E48T-I/OT, HelpURL=\\cern.ch\dfs\Applications\Altium\Datasheets\24AA02E48T-I-OT.pdf, LatestRevisionDate=31.03.2016, Manufacturer Part Number=24AA02E48T-I/OT, Mounted=Yes, PackageDescription="SOT, 0.95mm pitch; 5 pin, 1.60mm W X 2.90mm L X 1.45mm H body, IPC Medium Density", Part Description="1.7V-5.5V, 2K I2C Serial EEPROM With EUI-48 Node Identity", Part Number=24AA02E48T-I/OT, Pin Count=5, PressFit=No, Sense=No, SMD=Yes, Socket=No
IC2: "256-Kbit Serial I2C Bus EEPROM", Case=TSSOP8, Manufacturer="ST MICROELECTRONICS", Part Number=M24256-BRDW6P, Author="CERN DEM MR", Bonding=No, ComponentHeight=1.2mm, Component Type=Standard, CreateDate=17.03.2016, Device=M24256-BRDW6, HelpURL=\\cern.ch\dfs\Applications\Altium\Datasheets\M24256-BRDW6P.pdf, LatestRevisionDate=17.03.2016, Manufacturer Part Number=M24256-BRDW6, Mounted=Yes, PackageDescription="SOP, 0.65mm pitch; 8 pin, 4.40mm W X 3.00mm L X 1.20mm H body, IPC Medium Density", Part Description="256-Kbit Serial I2C Bus EEPROM", Pin Count=8, PressFit=No, Sense=No, SMD=Yes, Socket=No
IC3: "32-bit ARM®-based Cortex®-M0+ core Microcontroller, 1.62V to 3.6V, 48MHz, 256KB Flash, 32KB of SRAM, 48 QFN, Industrial Grade (-40°C to 125°C)", Case=QFN48, Manufacturer=MICROCHIP, Author="CERN DEM BC", Bonding=No, ComponentHeight=1mm, Component Type=Standard, CreateDate=23.01.2018, Device=ATSAMD21G18A-MF, HelpURL=\\cern.ch\dfs\Applications\Altium\Datasheets\ATSAMD21G18A-MF.pdf, LatestRevisionDate=23.01.2018, Manufacturer Part Number=ATSAMD21G18A-MF, Mounted=Yes, PackageDescription="QFN, 0.50mm Pitch, Square; 48 Pin, 7.00mm L X 7.00mm W X 1mm H Body (W/Thermal Tab 5.25mm X 5.25mm), IPC Medium Density", Part Description="32-bit ARM®-based Cortex®-M0+ core Microcontroller, 1.62V to 3.6V, 48MHz, 256KB Flash, 32KB SRAM, 48 QFN, Temperature Range -40°C to 125°C", Part Number=ATSAMD21G18A-MF, Pin Count=49, PressFit=No, Sense=No, SMD=Yes, Socket=No
IC4 IC6: "±15kV ESD-Protected, Low Power  RS-485/RS-422 Transceiver", Case=SOIC8, Manufacturer="ST MICROELECTRONICS", Author="CERN DEM MR", Bonding=No, ComponentHeight=1.75mm, Component Type=Standard, CreateDate=15.02.2018, Device=ST485ECDR, HelpURL=\\cern.ch\dfs\Applications\Altium\Datasheets\ST485ECDR.pdf, LatestRevisionDate=15.02.2018, Manufacturer Part Number=ST485ECDR, Mounted=Yes, PackageDescription="SOIC 8, Pitch 1.27mm - Body 4x5mm, IPC Medium Density", Part Description="±15kV ESD-Protected, Low Power  RS-485/RS-422 Transceiver", Part Number=ST485ECDR, Pin Count=8, PressFit=No, Sense=No, SMD=Yes, Socket=No
IC5: "16Mb, 3V, Multiple I/O Serial NOR Flash Memory", Case=SOIC8, Author=GK, Bonding=No, ComponentHeight=2.16mm, Component Type=Standard, CreateDate=28.11.2011, Device=AT25SF161-SSHD-B, HelpURL=\\cern.ch\dfs\Applications\Altium\Datasheets\N25Q128A13ESE40.pdf, LatestRevisionDate=30.07.2015, Manufacturer Part Number=AT25SF161-SSHD-B, Mounted=Yes, PackageDescription="SOIC, 1.27mm Pitch; 8 Pin, 5.285mm W X 5.335mm L X 2.16mm H body, IPC Medium Density", Part Description="16Mb, 2.7 to 3.6V, SPI Flash Memory", Part Number=AT25SF161-SSHD-B, Pin Count=8, PressFit=No, Sense=No, SMD=Yes, Socket=No
IC7: "0V to 6V Input, 1A, 1.5MHz, Step-Down DC-DC Converter", Case=SON6, Manufacturer="DIODES INCORPORATED", Author="CERN DEM MR", Bonding=No, ComponentHeight=0.8mm, Component Type=Standard, CreateDate=15.02.2018, Device=AUR9705AGD, HelpURL=\\cern.ch\dfs\Applications\Altium\Datasheets\AUR9705AGD.pdf, LatestRevisionDate=15.02.2018, Manufacturer Part Number=AUR9705AGD, Mounted=Yes, PackageDescription="SON, 0.65mm Pitch, 6 Pin, 2.00mm W X 2.00mm L X 0.80mm H body (W/Thermal Tab 0.65mm X 1.45mm), IPC Medium Density", Part Description="0V to 6V Input, 1A, 1.5MHz, Step-Down DC-DC Converter", Part Number=AUR9705AGD, Pin Count=7, PressFit=No, Sense=No, SMD=Yes, Socket=No
J1: library part HIROSE_ZX62RD-AB-5P8(30), "5 Pin + 1 Shield USB Receptacle", Manufacturer="HIROSE (HRS)", Manufacturer Part Number=ZX62RD-AB-5P8(30), Author="CERN DEM JMW", ComponentHeight=2.35mm, ComponentLink1Description=Package-Drawing, ComponentLink1URL=\\cern.ch\dfs\Applications\Altium\Datasheets\HIROSE_ZX62RD-AB-5P8(30)_Package-Drawing.pdf, Component Type=Standard, CreateDate=22.06.2017, Family="Micro-USB AB 2.0", HelpURL=\\cern.ch\dfs\Applications\Altium\Datasheets\HIROSE_ZX62RD-AB-5P8(30).pdf, LatestRevisionDate=22.06.2017, Mounted=Yes, Part Description="Micro-USB 2.0 Right Angle, SMD Type AB - Reverse (Top mount), Shell Through Hole", Part Number=HIROSE_ZX62RD-AB-5P8(30), Pin Count=7, PressFit=No, Sense=No, SMD=Yes, Socket=No, Status=None
J2: library part AMPHENOL_51939-667, "Thru-Hole, Lead 3.43mm, PowerBlade Right Angled Power Connector 3ACP 2P 24S 4P Contacts", Manufacturer=AMPHENOL, Manufacturer Part Number=51939-667, Author="CERN DEM JLC", ComponentHeight=12.57mm, Component Type=Standard, CreateDate=05.03.2019, Family=PwrBlade, HelpURL=\\cern.ch\dfs\Applications\Altium\Datasheets\AMPHENOL_51939-667.pdf, LatestRevisionDate=05.03.2019, Mounted=Yes, Part Description="Right Angle PowerBlade Power Connector 3ACP + 2P + 24S + 4P Contacts", Part Number=AMPHENOL_51939-667, Pin Count=33, PressFit=No, Sense=No, SMD=No, Socket=No, Status=None
J3: library part PHOENIX_1725669, "Terminal Block, 3 Positions, Screw Connection", Manufacturer="PHOENIX CONTACT", Manufacturer Part Number="1725669 (MPT 0,5/3-2,54)", Author="CERN DEM JMW", ComponentHeight=8.5mm, Component Type=Standard, CreateDate=07.11.2008, HelpURL=\\cern.ch\dfs\Applications\Altium\Datasheets\PHOENIX_1725669.pdf, LatestRevisionDate=26.04.2010, Mounted=Yes, Part Description="6A, 63V, Terminal Block, Pitch 2.54mm, 3 Positions, Screw Connection", Part Number=PHOENIX_1725669, Pin Count=3, PressFit=No, Sense=No, SMD=No, Socket=No, Status=None
J4: library part MOLEX_26-62-4030, "Connector 3 Male Without Contact Number 2, MOLEX Serie KK", Manufacturer=MOLEX, Manufacturer Part Number=26-62-4030, Author="CERN DEM JLC", ComponentHeight=14.73mm, Component Type=Standard, CreateDate=27.09.2012, Family=KK®, HelpURL=\\cern.ch\dfs\Applications\Altium\Datasheets\MOLEX_26-62-4030.pdf, LatestRevisionDate=27.09.2012, Mounted=Yes, Part Description="3.96mm (.156\") Pitch KK® Solid Header, Vertical, Friction Lock, 3 Circuits (Circuit 2 Voided), Tin (Sn) Plating", Part Number=MOLEX_26-62-4030, Pin Count=2, PressFit=No, Sense=No, SMD=No, Socket=No, Status=None
J5: library part MOLEX_26-60-4020, "Connector 2 Male", Manufacturer=MOLEX, Manufacturer Part Number=26-60-4020, Author="CERN DEM JLC", ComponentHeight=14.73mm, Component Type=Standard, CreateDate=06.04.2011, Family=KK®, HelpURL=\\cern.ch\dfs\Applications\Altium\Datasheets\MOLEX_26-60-4020.pdf, LatestRevisionDate=06.04.2011, Mounted=Yes, Part Description="3.96mm (.156\") Pitch KK® Solid Header, Vertical, Friction Lock, 2 Circuits, Tin (Sn) Plating", Part Number=MOLEX_26-60-4020, Pin Count=2, PressFit=No, Sense=No, SMD=No, Socket=No, Status=None
J6: library part MOLEX_26-60-4030, "Connector 3 Male", Manufacturer=MOLEX, Manufacturer Part Number=26-60-4030, Author="CERN DEM JLC", ComponentHeight=14.73mm, Component Type=Standard, CreateDate=04.10.2010, Family=KK®, HelpURL=\\cern.ch\dfs\Applications\Altium\Datasheets\MOLEX_26-60-4030.pdf, LatestRevisionDate=05.10.2010, Mounted=Yes, Part Description="3.96mm (.156\") Pitch KK® Solid Header, Vertical, Friction Lock, 3 Circuits, Tin (Sn) Plating", Part Number=MOLEX_26-60-4030, Pin Count=3, PressFit=No, Sense=No, SMD=No, Socket=No, Status=None
L1: library part IND_MURATA_DLW21SN900SQ2L, "Inductor Common Mode", Case=0805, Manufacturer=MURATA, Manufacturer Part Number=DLW21SN900SQ2L, Power=330mA, Resistance=0.35R, Tolerance=±25%, Author="CERN DEM JLC", ComponentHeight=1.4mm, Component Type=Standard, CreateDate=2014-07-01, HelpURL=\\cern.ch\dfs\Applications\Altium\Datasheets\IND_MURATA_DLW21S.pdf, LatestRevisionDate=2014-07-01, Mounted=Yes, Part Description="Wire Wound Common Mode Choke Coil (DLW21S Series)", Part Number=IND_MURATA_DLW21SN900SQ2L, Pin Count=4, SMD=Yes, Socket=No, Status=None, Table="Inductors SMD"
L2: library part IND_2.2UH_20%_MURATA_LQH44PN2R2MP0L, "Inductor With Core", Case=4040, Manufacturer=MURATA, Manufacturer Part Number=LQH44PN2R2MP0L, Power=1.8A, Resistance=0R049, Tolerance=±20%, Author="CERN DEM JLC", ComponentHeight=1.8mm, Component Type=Standard, CreateDate=14.02.2018, HelpURL=\\cern.ch\dfs\Applications\Altium\Datasheets\IND_MURATA_LQH44PN_P0.pdf, LatestRevisionDate=14.02.2018, Mounted=Yes, Part Description="Wire Wound Ferrite Inductor for Power Lines", Part Number=IND_2.2UH_20%_MURATA_LQH44PN2R2MP0L, Pin Count=2, Sense=No, SMD=Yes, Socket=No, Status=None
LD1 LD2: library part LED_DIALIGHT_571-0112F, "2x LED  Botom Green, Top Red", Manufacturer=DIALIGHT, Manufacturer Part Number=571-0112F, Author="CERN DEM JLC", Bonding=No, Color=Red/Green, ComponentHeight=8.6mm, Component Type=Standard, CreateDate=09.11.2009, HelpURL=\\cern.ch\dfs\Applications\Altium\Datasheets\LED_DIALIGHT_571-0112F.pdf, LatestRevisionDate=17.03.2010, Mounted=Yes, PackageDescription="2x 2mm LED (Top: Red, Bot: Green) PCB Edge Mounting (Without positioning pins) DIALIGHT 571 Serie", Part Description="Dual 2mm  LEDs, Red Top,Green Bot, CBI® Circuit Board Indicator (Without positioning pins)", Part Number=LED_DIALIGHT_571-0112F, Pin Count=4, PressFit=No, Sense=No, SMD=No, Socket=No
PB1: library part PB_TYCO_FSMSM, "Push-Button Switch SPDT", Manufacturer="TYCO ELECTRONICS", Manufacturer Part Number="FSMSM or 1437566-3", Author="CERN DEM JLC", ComponentHeight=4.3mm, Component Type=Standard, CreateDate=30.06.2008, Family="Push Button", HelpURL=\\cern.ch\dfs\Applications\Altium\Datasheets\PB_TYCO_FSMSM.pdf, LatestRevisionDate=21.06.2012, Mounted=Yes, PackageDescription="Body 3.5x6.0mm, Pushbutton Switch,  TYCO ALCOSWITCH FSMSM Serie", Part Description="12VDC 50mA SPST Tactile  Push-Button Switch", Part Number=PB_TYCO_FSMSM, Pin Count=2, PressFit=No, Sense=No, SMD=Yes, Socket=No, Status=None
Q1: library part XTAL_32.768KHZ_ABRACON_ABS09-32.768KHZ-T, "Quartz Crystal", Manufacturer=ABRACON, Manufacturer Part Number=ABS09-32.768KHZ-T, Author="CERN DEM JLC", Bonding=No, ComponentHeight=0.9mm, Component Type=Standard, CreateDate=16.10.2014, HelpURL=\\cern.ch\dfs\Applications\Altium\Datasheets\XTAL_ABRACON_ABS09.pdf, LatestRevisionDate=16.10.2014, Mounted=Yes, PackageDescription="2 Pins, 4.1x1.5mm, SMD Low Profile Crystal, ABS09 Serie", Part Description="Tolerance: ±20ppm, Stability: ±5ppm, -40°C to +85°C, 12.5pF, SMD Low Profile Crystal, ABS09 Series", Part Number=XTAL_32.768KHZ_ABRACON_ABS09-32.768KHZ-T, Pin Count=2, PressFit=No, Sense=No, SMD=Yes, Socket=No
R2 R5 R7 R11 R14 R17 R18 R19: library part R0402_1K_1%_0.0625W_100PPM, "Resistor - 1%", Case=0402, Manufacturer=GENERIC, Manufacturer1 ComponentHeight=0.4mm, Manufacturer1 Example="YAGEO PHYCOMP", Manufacturer1 Part Number=232270671002L, Power=0.0625W, Tolerance=±1%, Author="CERN DEM JLC", Component Type=Standard, CreateDate=03.12.2007, HelpURL=\\cern.ch\dfs\Applications\Altium\Datasheets\R0402_Phycomp_RC0402.pdf, LatestRevisionDate=17.10.2012, Manufacturer Part Number=R0402_1K_1%_0.0625W_100PPM, Mounted=Yes, Part Description="General Purpose Thick Film Chip Resistor", Part Number=R0402_1K_1%_0.0625W_100PPM, Pin Count=2, PressFit=No, Sense=No, SMD=Yes, Socket=No, Status="Not Recommended", TC=±100ppm/°C
R3 R4 R6 R8 R10 R13: library part R0402_10K_1%_0.0625W_100PPM, "Resistor - 1%", Case=0402, Manufacturer=GENERIC, Manufacturer1 ComponentHeight=0.4mm, Manufacturer1 Example="YAGEO PHYCOMP", Manufacturer1 Part Number=232270671003L, Power=0.0625W, Tolerance=±1%, Author="CERN DEM JLC", Component Type=Standard, CreateDate=2007-12-03, HelpURL=\\cern.ch\dfs\Applications\Altium\Datasheets\R0402_Phycomp_RC0402.pdf, LatestRevisionDate=2012-10-17, Manufacturer Part Number=R0402_10K_1%_0.0625W_100PPM, Mounted=Yes, Part Description="General Purpose Thick Film Chip Resistor", Part Number=R0402_10K_1%_0.0625W_100PPM, Pin Count=2, SMD=Yes, Socket=No, Status="Not recommended", Table="Resistors SMD", TC=±100ppm/°C
R12: library part R0402_49R9_1%_0.0625W_100PPM, "Resistor - 1%", Case=0402, Manufacturer=GENERIC, Manufacturer1 ComponentHeight=0.4mm, Manufacturer1 Example="YAGEO PHYCOMP", Manufacturer1 Part Number="232270674999L or RC0402FR-0749R9L", Power=0.0625W, Tolerance=±1%, Author="CERN DEM JLC", Component Type=Standard, CreateDate=2012-10-24, HelpURL=\\cern.ch\dfs\Applications\Altium\Datasheets\R0402_Phycomp_RC0402.pdf, LatestRevisionDate=2012-10-24, Manufacturer Part Number=R0402_49R9_1%_0.0625W_100PPM, Mounted=Yes, Part Description="General Purpose Thick Film Chip Resistor", Part Number=R0402_49R9_1%_0.0625W_100PPM, Pin Count=2, SMD=Yes, Socket=No, Status="Not recommended", Table="Resistors SMD", TC=±100ppm/°C
R15: library part R0402_100K_1%_0.0625W_100PPM, "Resistor - 1%", Case=0402, Manufacturer=GENERIC, Manufacturer1 ComponentHeight=0.4mm, Manufacturer1 Example="YAGEO PHYCOMP", Manufacturer1 Part Number=232270671004L, Power=0.0625W, Tolerance=±1%, Author="CERN DEM JLC", Component Type=Standard, CreateDate=03.12.2007, HelpURL=\\cern.ch\dfs\Applications\Altium\Datasheets\R0402_Phycomp_RC0402.pdf, LatestRevisionDate=17.10.2012, Manufacturer Part Number=R0402_100K_1%_0.0625W_100PPM, Mounted=Yes, Part Description="General Purpose Thick Film Chip Resistor", Part Number=R0402_100K_1%_0.0625W_100PPM, Pin Count=2, PressFit=No, Sense=No, SMD=Yes, Socket=No, Status="Not Recommended", TC=±100ppm/°C
R16: library part R0402_22K_1%_0.0625W_100PPM, "Resistor - 1%", Case=0402, Manufacturer=GENERIC, Manufacturer1 ComponentHeight=0.4mm, Manufacturer1 Example="YAGEO PHYCOMP", Manufacturer1 Part Number=232270672203L, Power=0.0625W, Tolerance=±1%, Author="CERN DEM JLC", Component Type=Standard, CreateDate=03.12.2007, HelpURL=\\cern.ch\dfs\Applications\Altium\Datasheets\R0402_Phycomp_RC0402.pdf, LatestRevisionDate=17.10.2012, Manufacturer Part Number=R0402_22K_1%_0.0625W_100PPM, Mounted=Yes, Part Description="General Purpose Thick Film Chip Resistor", Part Number=R0402_22K_1%_0.0625W_100PPM, Pin Count=2, PressFit=No, Sense=No, SMD=Yes, Socket=No, Status="Not Recommended", TC=±100ppm/°C

## Free pads (board coordinates)
  round 4.3 hole 2.7: P13(3.57,5.55) P13(3.57,94.45)

## Nets (pads, with @x,y where several pads share a name; then routed paths per layer and width w, separated by ;. In a path a pad name is that pad's centre, name@x,y a point inside that pad or via, vN(x,y) a via of type N, cw(c..) or ccw(c..) an arc to the next point about the centre after c; other vN are vias at no path point)
CAN_CSn: IC3.28
CAN_INT: IC3.24
CAN_MISO: IC3.16 IC5.2
CAN_MOSI: IC3.13 IC5.5
CAN_SCK: IC3.14 IC5.6
DEV_RESETn: IC3.29
ETH_RESETn: IC3.22
GND: C1.1 C2.2 C3.2 C4.2 C5.1 C6.2 C7.2 C8.2 C9.2 C10.2 C11.2 C12.1 C13.2 D1.3 D3.3 D4.1 IC1.2 IC1.5 IC2.2 IC2.3 IC2.4 IC2.7 IC3.5 IC3.18 IC3.35 IC3.42 IC3.49 IC4.5 IC5.4 IC6.5 IC7.5 IC7.7 J1.5 J1.6 J3.2 LD1.1 LD2.1 pad.P13@3.57,94.45 PB1.1 R16.1
GSM_PWR: IC3.41
INT: IC3.23
IO0: IC3.3
IO1: IC3.4
MODBUS_A: D3.1 IC6.6
MODBUS_B: D3.2 IC6.7
MODBUS_DE: IC3.30 IC6.3
MODBUS_DI: IC3.25 IC6.4
MODBUS_R_En: IC6.2 R7.1
MODBUS_RO: IC3.26 R11.1
NetC1_2: C1.2 IC3.2 Q1.1
NetC2_1: C2.1 IC3.1 Q1.2
NetC5_2: C5.2 IC3.43
NetC8_1: C8.1 FB1.2 IC3.6
NetC14_1: C14.1 IC7.6 R15.1 R16.2
NetD1_1: D1.1 IC4.6 J3.1
NetD1_2: D1.2 IC4.7 J3.3
NetD4_2: D4.2 J1.2 L1.4
NetD4_3: D4.3 J1.3 L1.1
NetIC4_1: IC4.1 R2.2
NetIC5_3: IC5.3 IC5.7 R13.1
NetIC6_1: IC6.1 R11.2
NetIC7_4: IC7.4 L2.1
NetJP1_1: 
NetLD1_2: LD1.2 R17.1
NetLD1_4: LD1.4 R14.1
NetLD2_2: LD2.2 R19.1
NetLD2_4: LD2.4 R18.1
NetPB1_2: PB1.2 R12.2
P3V3: C7.1 C9.1 C10.1 C11.1 C13.1 C14.2 D2.1 IC1.4 IC2.1 IC2.8 IC3.17 IC3.36 IC3.44 IC5.8 L2.2 R3.2 R4.2 R6.1 R8.2 R10.2 R13.2 R14.2 R15.2 R17.2 R18.2 R19.2
P5V0: C3.1 C6.1 C12.2 D4.4 IC4.8 IC6.8 IC7.2 IC7.3 J1.1
RESETn: C4.1 D2.2 IC3.40 R6.2 R8.1 R12.1
RS485_DE: IC3.11 IC4.3
RS485_DI: IC3.9 IC4.4
RS485_R_En: IC4.2 R5.1
RS485_RO: IC3.10 R2.1
RXLED: IC3.12
SCL/Rx: IC1.1 IC2.6 IC3.32 R3.1
SDA/Tx: IC1.3 IC2.5 IC3.31 R4.1
SPI0_SS0: IC3.15
SPI0_SS1: IC3.8 IC5.1 R10.1
SPI1_MISO: IC3.21
SPI1_MOSI: IC3.19
SPI1_NSS: IC3.27
SPI1_SCK: IC3.20
SWCLK: IC3.45 R5.2
SWDIO: IC3.46 R7.2
TXLED: IC3.39 LD1.3 LD2.3
U1_CTS: IC3.38
U1_RTS: IC3.37
U1_RXD: IC3.48
U1_TXD: IC3.47
USB_D_N: IC3.33 L1.3
USB_D_P: IC3.34 L1.2
pads on no net: Designator352.1 Designator352.2 Designator352.4 Designator352.5 Designator352.6 Designator352.7 Designator352.8 Designator352.9 Designator352.10 Designator352.11 Designator352.12 Designator352.13 Designator352.14 Designator352.15 Designator352.16 Designator353.1 Designator353.2 Designator353.4 Designator353.5 Designator353.6 Designator353.7 Designator353.8 Designator353.9 Designator353.10 Designator353.11 Designator353.12 Designator353.13 Designator353.14 Designator353.15 Designator353.16 Designator354.1 Designator354.2 Designator354.3 Designator354.6 Designator354.7 Designator354.8 Designator354.9 Designator354.12 Designator359.1 Designator359.2 FB1.1 IC3.7 IC7.1 J1.4 J1.PastePad J2.A1 J2.A2 J2.A3 J2.A4 J2.A5 J2.A6 J2.B1 J2.B2 J2.B3 J2.B4 J2.B5 J2.B6 J2.C1 J2.C2 J2.C3 J2.C4 J2.C5 J2.C6 J2.D1 J2.D2 J2.D3 J2.D4 J2.D5 J2.D6 J2.MTG1 J2.MTG2 J2.P1 J2.P2 J2.P3 J2.P4 J2.P5 J2.P6 J2.P7 J2.P8 J2.P9 J3.4 J3.5 J3.6 J4.1 J4.3 J5.1 J5.2 J6.1 J6.2 J6.3
copper on no net: | length 1.6
  Bottom Layer w0.1: 216.889,79.65 218.039,78.5

## Polygon pours and split planes (outlines as drawn)
no net on Bottom Layer "esd1" (solid, remove dead copper, pour order 205): 157.609,1 157.626,1 159.126,2.5 119.676,2.5 119.676,1
no net on Bottom Layer "esd1" (solid, remove dead copper, pour order 201): 0.25,7.075 7.375,7.075 7.375,2.55 40,2.55 40,1.05 0.25,1.05
no net on Top Layer "esd1" (solid, remove dead copper, pour order 189): 157.733,1 157.75,1 159.25,2.5 119.799,2.5 119.799,1
no net on Top Layer "esd1" (solid, remove dead copper, pour order 191): 82.933,1 103,1 103,2.5 45,2.5 45,1
no net on Top Layer "esd1" (solid, remove dead copper, pour order 123): 0.25,7.075 7.375,7.075 7.375,2.55 40,2.55 40,1.05 0.25,1.05

## Keep-outs
Keep-Out Layer:
  lines w0.2: 0,0 159.25,0 159.25,100 0,100

## Other copper
Top Layer:
  text "https://diot-monimod.readthedocs.io/en/latest/" at 15,103 h2.54
  text ".Layer_Name" at 70.605,-32.385 h1.91
  text "1" at 81.4,-46.355 h2.54
Bottom Layer:
  text ".Layer_Name" at 108.705,-32.385 h1.91
  text "12" at 136.225,-46.425 h2.54

## Silkscreen, mask and mechanical layers (free items; w line width, h text height)
Top Overlay:
  text ".Layer_Name" at 130.605,-34.925 h1.91
Bottom Overlay:
  text ".Layer_Name" at 168.705,-34.925 h1.91
Top Paste:
  text ".Layer_Name" at 130.605,-40.005 h1.91
Bottom Paste:
  text ".Layer_Name" at 168.705,-40.005 h1.91
Top Solder:
  rectangle: 0.623,0.603 219.419,2.4
  rectangle: 87.5,4.9 88,6.1
  rectangle: 123.2,95.15 151.6,96.3
  rectangle: 150.3,75.975 151.55,96.325
  rectangle: 123.2,76 151.525,77.075
  rectangle: 123.125,86.575 124.075,96.275
  rectangle: 123.225,76.1 124.075,85.7
  rectangle: 123.225,54.55 124.075,64.15
  rectangle: 123.125,65.025 124.075,74.725
  rectangle: 123.2,54.45 151.525,55.525
  rectangle: 150.3,54.425 151.55,74.775
  rectangle: 123.2,73.6 151.6,74.75
  region: 206.037,51.755 206.037,48.255 220,48.255 220,51.755
  text ".Layer_Name" at 70.605,-37.465 h1.91
Bottom Solder:
  rectangle: 0.623,0.603 219.419,2.4
  region: 206.037,51.755 206.037,48.255 220,48.255 220,51.755
  text ".Layer_Name" at 168.705,-37.465 h1.91
Mechanical 1:
  lines w0.1: 0,0 0,100 160,100 160,0 0,0
Mechanical 2:
  lines w0.254: 136,50 190,50
Mechanical 13:
  text "RPS-400-12 or EPP-400-12" at 57.675,86.05 h2.54

## Dimensions
0,0 to 3.57,5.55 on Drill Drawing
3.57,5.55 to 0,0 on Drill Drawing

## Text inside footprints (layer, text, board x,y; h text height)
Designator352: Mechanical 14 "16" at 34.537,73.19 h1.2 r90; Mechanical 14 "10" at 50.602,73.22 h1.2 r90; Mechanical 14 "5" at 50.24,68.8 h1.2 r90; Mechanical 14 "6" at 46.43,68.8 h1.2 r90; Mechanical 14 "7" at 42.62,68.8 h1.2 r90; Mechanical 14 "8" at 38.81,68.8 h1.2 r90; Mechanical 14 "9" at 35,68.8 h1.2 r90; Mechanical 14 "4" at 50.24,22.094 h1.2 r90; Mechanical 14 "3" at 46.43,22.165 h1.2 r90; Mechanical 14 "2" at 42.62,22.142 h1.2 r90; Mechanical 14 "1" at 35,22.13 h1.2 r90
Designator353: Mechanical 14 "16" at 74.537,73.19 h1.2 r90; Mechanical 14 "10" at 90.602,73.22 h1.2 r90; Mechanical 14 "5" at 90.24,68.8 h1.2 r90; Mechanical 14 "6" at 86.43,68.8 h1.2 r90; Mechanical 14 "7" at 82.62,68.8 h1.2 r90; Mechanical 14 "8" at 78.81,68.8 h1.2 r90; Mechanical 14 "9" at 75,68.8 h1.2 r90; Mechanical 14 "4" at 90.24,22.094 h1.2 r90; Mechanical 14 "3" at 86.43,22.165 h1.2 r90; Mechanical 14 "2" at 82.62,22.142 h1.2 r90; Mechanical 14 "1" at 75,22.13 h1.2 r90
Designator354: Top Overlay "8" at 110.125,53.63 h1.5 r180; Top Overlay "1" at 110.125,35.85 h1.5 r180; Notvisible "2" at 110.125,38.39 h1.5 r180; Notvisible "3" at 110.125,40.93 h1.5 r180; Notvisible "6" at 110.125,48.55 h1.5 r180; Notvisible "7" at 110.125,51.09 h1.5 r180; Mechanical 14 "8" at 110.125,53.63 h1.5 r180; Mechanical 14 "1" at 110.125,35.85 h1.5 r180
Designator359: Top Overlay "1" at 13.11,73.19 h1 r270; Mechanical 14 "1" at 13.11,73.19 h1 r270
J1: Notvisible "PCB end" at -0.465,82.6 h0.5 r270; Drill Drawing "r0.2" at 3.31,76 h1 r270; Drill Drawing "1.87" at 0.299,78.659 h1; Drill Drawing "0.85" at -2.306,79.802 h1 r270
J2: Top Overlay "D6" at 143.9,62.16 h1.2; Top Overlay "D5" at 143.9,59.52 h1.2; Top Overlay "D4" at 143.9,57.08 h1.2; Top Overlay "D3" at 143.9,54.54 h1.2; Top Overlay "D2" at 143.9,52 h1.2; Top Overlay "D1" at 143.9,49.46 h1.2; Top Overlay "P9" at 143.9,81.82 h1.2; Top Overlay "P8" at 143.9,76.74 h1.2; Top Overlay "P7" at 143.9,71.66 h1.2; Top Overlay "P6" at 143.9,66.58 h1.2; Top Overlay "P5" at 143.9,44.98 h1.2; Top Overlay "P4" at 143.9,38.63 h1.2; Top Overlay "P3" at 143.9,32.28 h1.2; Top Overlay "P2" at 143.9,24.66 h1.2; Top Overlay "P1" at 143.9,16.96 h1.2; Notvisible "PCB" at 159.4,48.36 h1.2 r90; Mechanical 14 "P1" at 143.9,16.96 h1.2; Mechanical 14 "P2" at 143.9,24.66 h1.2; Mechanical 14 "P3" at 143.9,32.28 h1.2; Mechanical 14 "P4" at 143.9,38.63 h1.2; Mechanical 14 "P5" at 143.9,44.98 h1.2; Mechanical 14 "P6" at 143.9,66.58 h1.2; Mechanical 14 "P7" at 143.9,71.66 h1.2; Mechanical 14 "P8" at 143.9,76.74 h1.2; Mechanical 14 "P9" at 143.9,81.82 h1.2; Mechanical 14 "D1" at 143.9,49.46 h1.2; Mechanical 14 "D2" at 143.9,52 h1.2; Mechanical 14 "D3" at 143.9,54.54 h1.2; Mechanical 14 "D4" at 143.9,57.08 h1.2; Mechanical 14 "D5" at 143.9,59.52 h1.2; Mechanical 14 "D6" at 143.9,62.16 h1.2
J3: Top Overlay "1" at 141.778,92.667 h1 r270; Top Overlay "2" at 141.778,90.381 h1 r270; Top Overlay "3" at 141.778,87.841 h1 r270
J4: Top Overlay "1" at 139.35,67.772 h1 r90; Mechanical 14 "1" at 139.35,67.772 h1 r90
J5: Top Overlay "1" at 139.35,20.751 h1 r90; Mechanical 14 "1" at 139.35,20.751 h1 r90
J6: Top Overlay "1" at 139.35,29.772 h1 r90; Mechanical 14 "1" at 139.35,29.772 h1 r90